# EAGLE board Daughter_Board_V1 (EAGLE 9.6.2)
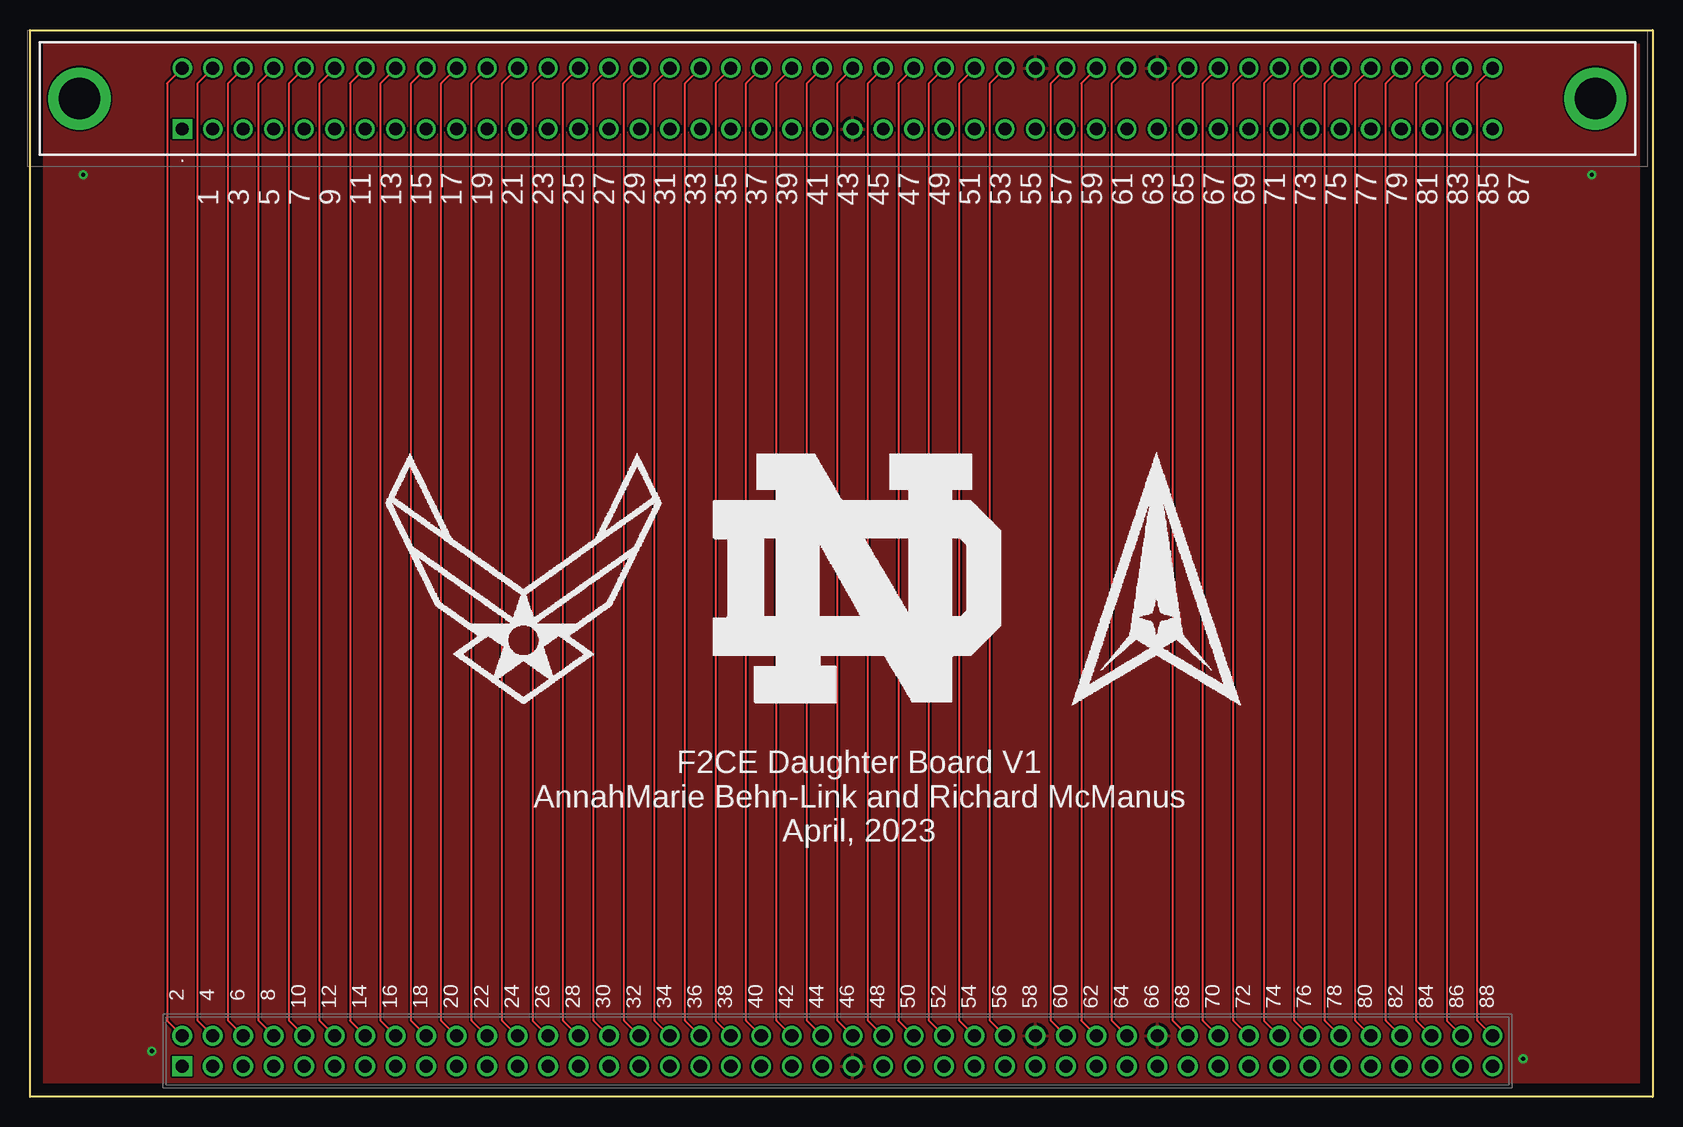
[diagram p0: board, top side]
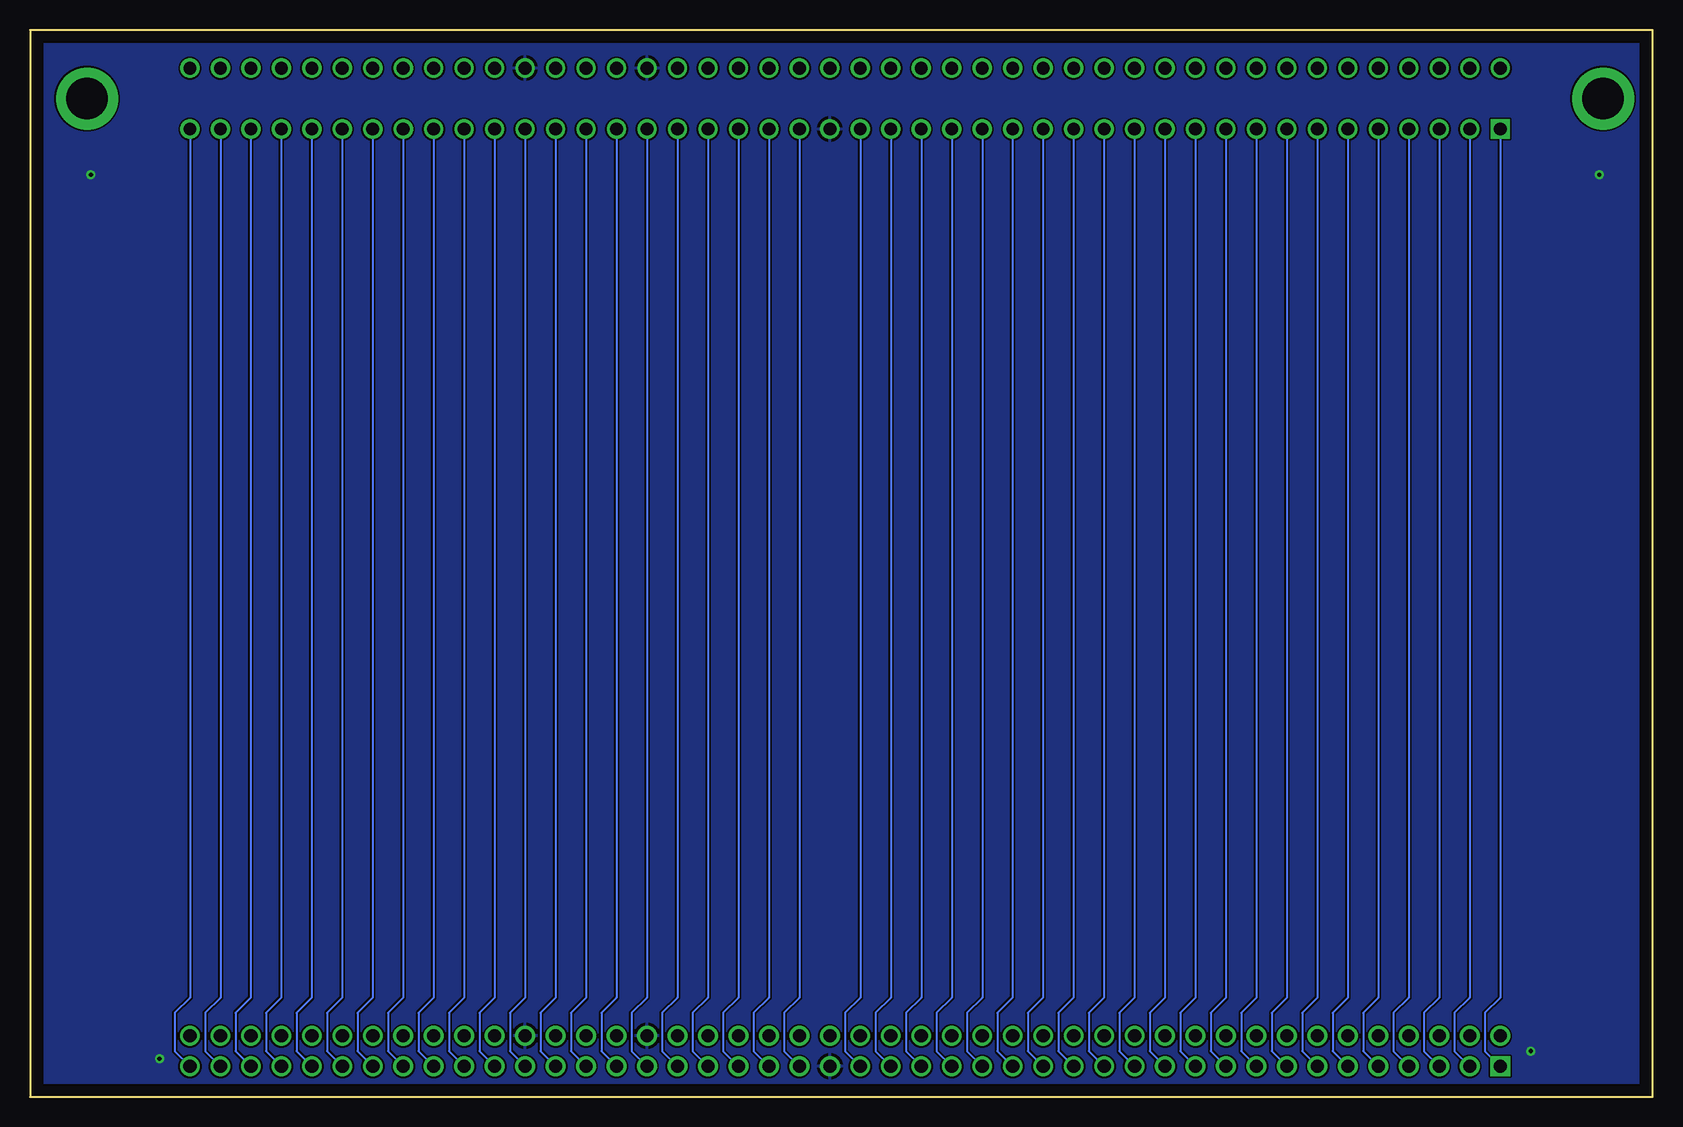
[diagram p1: board, bottom side, seen from below]

Size 135.25 x 88.9 mm. Coordinates in mm from the lower left corner, seen from the top.
Outline: 0,0 0,88.9 135.25,88.9 135.25,0 0,0
Copper layers (1*16): Top 0.035mm / dielectric 1.5mm / Bottom 0.035mm
Design rules "default": minimum track width 6mil, minimum drill 0.35mm, track to track 6mil, track to pad 6mil, pad to pad 6mil, via to via 6mil, smd to smd 6mil, copper to edge 40mil, drill to drill 6mil, minimum pad ring 10mil, minimum via ring 8mil, stop-mask expansion 4mil, vias tented up to drill 0mil, thermal gap 10mil

## Footprints (pad centres in the part's own frame; a part is rotated, then mirrored left to right if it is on the bottom)
88-PIN-HEADER = drill 1.1 pad 1.65 square: 1 0,109.22 | drill 1.1 pad 1.65: 2 2.54,109.22; 3 0,106.68; 4 2.54,106.68; 5 0,104.14; 6 2.54,104.14; 7 0,101.6; 8 2.54,101.6; 9 0,99.06; 10 2.54,99.06; 11 0,96.52; 12 2.54,96.52; 13 0,93.98; 14 2.54,93.98; 15 0,91.44; 16 2.54,91.44; 17 0,88.9; 18 2.54,88.9; 19 0,86.36; 20 2.54,86.36; 21 0,83.82; 22 2.54,83.82; 23 0,81.28; 24 2.54,81.28; 25 0,78.74; 26 2.54,78.74; 27 0,76.2; 28 2.54,76.2; 29 0,73.66; 30 2.54,73.66; 31 0,71.12; 32 2.54,71.12; 33 0,68.58; 34 2.54,68.58; 35 0,66.04; 36 2.54,66.04; 37 0,63.5; 38 2.54,63.5; 39 0,60.96; 40 2.54,60.96; 41 0,58.42; 42 2.54,58.42; 43 0,55.88; 44 2.54,55.88; 45 0,53.34; 46 2.54,53.34; 47 0,50.8; 48 2.54,50.8; 49 0,48.26; 50 2.54,48.26; 51 0,45.72; 52 2.54,45.72; 53 0,43.18; 54 2.54,43.18; 55 0,40.64; 56 2.54,40.64; 57 0,38.1; 58 2.54,38.1; 59 0,35.56; 60 2.54,35.56; 61 0,33.02; 62 2.54,33.02; 63 0,30.48; 64 2.54,30.48; 65 0,27.94; 66 2.54,27.94; 67 0,25.4; 68 2.54,25.4; 69 0,22.86; 70 2.54,22.86; 71 0,20.32; 72 2.54,20.32; 73 0,17.78; 74 2.54,17.78; 75 0,15.24; 76 2.54,15.24; 77 0,12.7; 78 2.54,12.7; 79 0,10.16; 80 2.54,10.16; 81 0,7.62; 82 2.54,7.62; 83 0,5.08; 84 2.54,5.08; 85 0,2.54; 86 2.54,2.54; 87 0,0; 88 2.54,0
395088520202 = drill 1.07 pad 1.605 square: 1 0,0 | drill 1.07 pad 1.605: 2 0,5.08; 3 2.54,0; 4 2.54,5.08; 5 5.08,0; 6 5.08,5.08; 7 7.62,0; 8 7.62,5.08; 9 10.16,0; 10 10.16,5.08; 11 12.7,0; 12 12.7,5.08; 13 15.24,0; 14 15.24,5.08; 15 17.78,0; 16 17.78,5.08; 17 20.32,0; 18 20.32,5.08; 19 22.86,0; 20 22.86,5.08; 21 25.4,0; 22 25.4,5.08; 23 27.94,0; 24 27.94,5.08; 25 30.48,0; 26 30.48,5.08; 27 33.02,0; 28 33.02,5.08; 29 35.56,0; 30 35.56,5.08; 31 38.1,0; 32 38.1,5.08; 33 40.64,0; 34 40.64,5.08; 35 43.18,0; 36 43.18,5.08; 37 45.72,0; 38 45.72,5.08; 39 48.26,0; 40 48.26,5.08; 41 50.8,0; 42 50.8,5.08; 43 53.34,0; 44 53.34,5.08; 45 55.88,0; 46 55.88,5.08; 47 58.42,0; 48 58.42,5.08; 49 60.96,0; 50 60.96,5.08; 51 63.5,0; 52 63.5,5.08; 53 66.04,0; 54 66.04,5.08; 55 68.58,0; 56 68.58,5.08; 57 71.12,0; 58 71.12,5.08; 59 73.66,0; 60 73.66,5.08; 61 76.2,0; 62 76.2,5.08; 63 78.74,0; 64 78.74,5.08; 65 81.28,0; 66 81.28,5.08; 67 83.82,0; 68 83.82,5.08; 69 86.36,0; 70 86.36,5.08; 71 88.9,0; 72 88.9,5.08; 73 91.44,0; 74 91.44,5.08; 75 93.98,0; 76 93.98,5.08; 77 96.52,0; 78 96.52,5.08; 79 99.06,0; 80 99.06,5.08; 81 101.6,0; 82 101.6,5.08; 83 104.14,0; 84 104.14,5.08; 85 106.68,0; 86 106.68,5.08; 87 109.22,0; 88 109.22,5.08 | drill 3.45 pad 5.175: MH1 -8.575,2.54; MH2 117.795,2.54

## Placement (x,y rotation side)
J1  88-PIN-HEADER  [88-PIN-HEADER]  121.92,2.54 90 top
J2  395-088-520-202  [395088520202]  12.7,80.65 0 top

## Library data of the parts
J1 = 88-PIN-HEADER; DESCRIPTION: Headers & Wire Housings CGrid Bkwy Hdr DR Rt DR RtPn 15''SAu 4Ckt; HEIGHT: 8.51mm; MANUFACTURER_NAME: Molex; MANUFACTURER_PART_NUMBER: 70287-1098; MOUSER_PART_NUMBER: 538-70287-1098; MOUSER_PRICE-STOCK: https://www.mouser.co.uk/ProductDetail/Molex/70287-1098?qs=kYQSPAH4sJyJ%2F7vCw3ffjg%3D%3D
J2 = 395-088-520-202; DESCRIPTION: Standard Card Edge Connectors .100" (2.54mm) Pitch Card Edge Connector; HEIGHT: 15.24mm; MANUFACTURER_NAME: EDAC; MANUFACTURER_PART_NUMBER: 395-088-520-202

## Nets
GND: J1.45 J1.58 J1.66 J2.45 J2.58 J2.66
N$1: J1.87 J2.87
N$2: J1.85 J2.85
N$3: J1.83 J2.83
N$4: J1.81 J2.81
N$5: J1.79 J2.79
N$6: J1.77 J2.77
N$7: J1.75 J2.75
N$8: J1.73 J2.73
N$9: J1.71 J2.71
N$10: J1.69 J2.69
N$11: J1.67 J2.67
N$12: J1.65 J2.65
N$13: J1.63 J2.63
N$14: J1.61 J2.61
N$15: J1.59 J2.59
N$16: J1.57 J2.57
N$17: J1.55 J2.55
N$18: J1.53 J2.53
N$19: J1.51 J2.51
N$20: J1.49 J2.49
N$21: J1.47 J2.47
N$23: J1.43 J2.43
N$24: J1.41 J2.41
N$25: J1.39 J2.39
N$26: J1.37 J2.37
N$27: J1.35 J2.35
N$28: J1.33 J2.33
N$29: J1.31 J2.31
N$30: J1.29 J2.29
N$31: J1.27 J2.27
N$32: J1.25 J2.25
N$33: J1.23 J2.23
N$34: J1.21 J2.21
N$35: J1.19 J2.19
N$36: J1.17 J2.17
N$37: J1.15 J2.15
N$38: J1.13 J2.13
N$39: J1.11 J2.11
N$40: J1.9 J2.9
N$41: J1.7 J2.7
N$42: J1.5 J2.5
N$43: J1.3 J2.3
N$44: J1.1 J2.1
N$45: J1.88 J2.88
N$46: J1.86 J2.86
N$47: J1.84 J2.84
N$48: J1.82 J2.82
N$49: J1.80 J2.80
N$50: J1.78 J2.78
N$51: J1.76 J2.76
N$52: J1.72 J2.72
N$53: J1.70 J2.70
N$54: J1.74 J2.74
N$55: J1.68 J2.68
N$57: J1.64 J2.64
N$58: J1.62 J2.62
N$59: J1.60 J2.60
N$61: J1.56 J2.56
N$62: J1.54 J2.54
N$63: J1.52 J2.52
N$64: J1.50 J2.50
N$65: J1.48 J2.48
N$66: J1.46 J2.46
N$67: J1.44 J2.44
N$68: J1.42 J2.42
N$69: J1.40 J2.40
N$70: J1.38 J2.38
N$71: J1.36 J2.36
N$72: J1.34 J2.34
N$73: J1.32 J2.32
N$74: J1.30 J2.30
N$75: J1.28 J2.28
N$76: J1.26 J2.26
N$77: J1.24 J2.24
N$78: J1.22 J2.22
N$79: J1.20 J2.20
N$80: J1.18 J2.18
N$81: J1.16 J2.16
N$82: J1.14 J2.14
N$83: J1.12 J2.12
N$84: J1.10 J2.10
N$85: J1.8 J2.8
N$86: J1.6 J2.6
N$87: J1.4 J2.4
N$88: J1.2 J2.2

## Tracks (layer width: path | path; a pad name or v marks a point on that pad's centre or on a via)
GND  (via drill 0.35)
  other vias: 10.16,3.81 124.46,3.17 130.18,76.84 4.44,76.84
  pour Top: 0,0 0,88.9 135.25,88.9 135.25,0
  pour Bottom: 0,0 0,88.9 135.25,88.9 135.25,0
N$1
  Bottom 0.152: J2.87 121.92,8.26 123.19,6.98 123.19,3.81 J1.87
N$2
  Bottom 0.152: J2.85 119.38,8.26 120.65,6.98 120.65,3.81 J1.85
N$3
  Bottom 0.152: J2.83 116.84,8.26 118.11,6.98 118.11,3.81 J1.83
N$4
  Bottom 0.152: J2.81 114.3,8.26 115.57,6.98 115.57,3.81 J1.81
N$5
  Bottom 0.152: J2.79 111.76,8.26 113.03,6.98 113.03,3.81 J1.79
N$6
  Bottom 0.152: J2.77 109.22,8.26 110.49,6.98 110.49,3.81 J1.77
N$7
  Bottom 0.152: J2.75 106.68,8.26 107.95,6.98 107.95,3.81 J1.75
N$8
  Bottom 0.152: J2.73 104.14,8.26 105.41,6.98 105.41,3.81 J1.73
N$9
  Bottom 0.152: J2.71 101.6,8.26 102.87,6.98 102.87,3.81 J1.71
N$10
  Bottom 0.152: J2.69 99.06,8.26 100.33,6.98 100.33,3.81 J1.69
N$11
  Bottom 0.152: J2.67 96.52,8.26 97.79,6.98 97.79,3.81 J1.67
N$12
  Bottom 0.152: J2.65 93.98,8.26 95.25,6.98 95.25,3.81 J1.65
N$13
  Bottom 0.152: J2.63 91.44,8.26 92.71,6.98 92.71,3.81 J1.63
N$14
  Bottom 0.152: J2.61 88.9,8.26 90.17,6.98 90.17,3.81 J1.61
N$15
  Bottom 0.152: J2.59 86.36,8.26 87.63,6.98 87.63,3.81 J1.59
N$16
  Bottom 0.152: J2.57 83.82,8.26 85.09,6.98 85.09,3.81 J1.57
N$17
  Bottom 0.152: J2.55 81.28,8.26 82.55,6.98 82.55,3.81 J1.55
N$18
  Bottom 0.152: J2.53 78.74,8.26 80.01,6.98 80.01,3.81 J1.53
N$19
  Bottom 0.152: J2.51 76.2,8.26 77.47,6.98 77.47,3.81 J1.51
N$20
  Bottom 0.152: J2.49 73.66,8.26 74.93,6.98 74.93,3.81 J1.49
N$21
  Bottom 0.152: J2.47 71.12,8.26 72.39,6.98 72.39,3.81 J1.47
N$23
  Bottom 0.152: J2.43 66.04,8.26 67.31,6.98 67.31,3.81 J1.43
N$24
  Bottom 0.152: J2.41 63.5,8.26 64.77,6.98 64.77,3.81 J1.41
N$25
  Bottom 0.152: J2.39 60.96,8.26 62.23,6.98 62.23,3.81 J1.39
N$26
  Bottom 0.152: J2.37 58.42,8.26 59.69,6.98 59.69,3.81 J1.37
N$27
  Bottom 0.152: J2.35 55.88,8.26 57.15,6.98 57.15,3.81 J1.35
N$28
  Bottom 0.152: J2.33 53.34,8.26 54.61,6.98 54.61,3.81 J1.33
N$29
  Bottom 0.152: J2.31 50.8,8.26 52.07,6.98 52.07,3.81 J1.31
N$30
  Bottom 0.152: J2.29 48.26,8.26 49.53,6.98 49.53,3.81 J1.29
N$31
  Bottom 0.152: J2.27 45.72,8.26 46.99,6.98 46.99,3.81 J1.27
N$32
  Bottom 0.152: J2.25 43.18,8.26 44.45,6.98 44.45,3.81 J1.25
N$33
  Bottom 0.152: J2.23 40.64,8.26 41.91,6.98 41.91,3.81 J1.23
N$34
  Bottom 0.152: J2.21 38.1,8.26 39.37,6.98 39.37,3.81 J1.21
N$35
  Bottom 0.152: J2.19 35.56,8.26 36.83,6.98 36.83,3.81 J1.19
N$36
  Bottom 0.152: J2.17 33.02,8.26 34.29,6.98 34.29,3.81 J1.17
N$37
  Bottom 0.152: J2.15 30.48,8.26 31.75,6.98 31.75,3.81 J1.15
N$38
  Bottom 0.152: J2.13 27.94,8.26 29.21,6.98 29.21,3.81 J1.13
N$39
  Bottom 0.152: J2.11 25.4,8.26 26.67,6.98 26.67,3.81 J1.11
N$40
  Bottom 0.152: J2.9 22.86,8.26 24.13,6.98 24.13,3.81 J1.9
N$41
  Bottom 0.152: J2.7 20.32,8.26 21.59,6.98 21.59,3.81 J1.7
N$42
  Bottom 0.152: J2.5 17.78,8.26 19.05,6.98 19.05,3.81 J1.5
N$43
  Bottom 0.152: J2.3 15.24,8.26 16.51,6.98 16.51,3.81 J1.3
N$44
  Bottom 0.152: J2.1 12.7,8.26 13.97,6.98 13.97,3.81 J1.1
N$45
  Top 0.152: J1.88 120.65,6.35 120.65,84.45 J2.88
N$46
  Top 0.152: J2.86 118.11,84.45 118.11,6.35 J1.86
N$47
  Top 0.152: J1.84 115.57,6.35 115.57,84.45 J2.84
N$48
  Top 0.152: J1.82 113.03,6.35 113.03,84.45 J2.82
N$49
  Top 0.152: J1.80 110.49,6.35 110.49,84.45 J2.80
N$50
  Top 0.152: J1.78 107.95,6.35 107.95,84.45 J2.78
N$51
  Top 0.152: J1.76 105.41,6.35 105.41,84.45 J2.76
N$52
  Top 0.152: J1.72 100.33,6.35 100.33,84.45 J2.72
N$53
  Top 0.152: J1.70 97.79,6.35 97.79,84.45 J2.70
N$54
  Top 0.152: J2.74 102.87,84.45 102.87,6.35 J1.74
N$55
  Top 0.152: J1.68 95.25,6.35 95.25,84.45 J2.68
N$57
  Top 0.152: J1.64 90.17,6.35 90.17,84.45 J2.64
N$58
  Top 0.152: J2.62 87.63,84.45 87.63,6.35 J1.62
N$59
  Top 0.152: J1.60 85.09,6.35 85.09,84.45 J2.60
N$61
  Top 0.152: J1.56 80.01,6.35 80.01,84.45 J2.56
N$62
  Top 0.152: J1.54 77.47,6.35 77.47,84.45 J2.54
N$63
  Top 0.152: J1.52 74.93,6.35 74.93,84.45 J2.52
N$64
  Top 0.152: J2.50 72.39,84.45 72.39,6.35 J1.50
N$65
  Top 0.152: J1.48 69.85,6.35 69.85,84.45 J2.48
N$66
  Top 0.152: J1.46 67.31,6.35 67.31,84.45 J2.46
N$67
  Top 0.152: J1.44 64.77,6.35 64.77,84.45 J2.44
N$68
  Top 0.152: J1.42 62.23,6.35 62.23,84.45 J2.42
N$69
  Top 0.152: J1.40 59.69,6.35 59.69,84.45 J2.40
N$70
  Top 0.152: J2.38 57.15,84.45 57.15,6.35 J1.38
N$71
  Top 0.152: J1.36 54.61,6.35 54.61,84.45 J2.36
N$72
  Top 0.152: J1.34 52.07,6.35 52.07,84.45 J2.34
N$73
  Top 0.152: J1.32 49.53,6.35 49.53,84.45 J2.32
N$74
  Top 0.152: J1.30 46.99,6.35 46.99,84.45 J2.30
N$75
  Top 0.152: J1.28 44.45,6.35 44.45,84.45 J2.28
N$76
  Top 0.152: J2.26 41.91,84.45 41.91,6.35 J1.26
N$77
  Top 0.152: J1.24 39.37,6.35 39.37,84.45 J2.24
N$78
  Top 0.152: J1.22 36.83,6.35 36.83,84.45 J2.22
N$79
  Top 0.152: J1.20 34.29,6.35 34.29,84.45 J2.20
N$80
  Top 0.152: J1.18 31.75,6.35 31.75,84.45 J2.18
N$81
  Top 0.152: J1.16 29.21,6.35 29.21,84.45 J2.16
N$82
  Top 0.152: J2.14 26.67,84.45 26.67,6.35 J1.14
N$83
  Top 0.152: J1.12 24.13,6.35 24.13,84.45 J2.12
N$84
  Top 0.152: J1.10 21.59,6.35 21.59,84.45 J2.10
N$85
  Top 0.152: J1.8 19.05,6.35 19.05,84.45 J2.8
N$86
  Top 0.152: J1.6 16.51,6.35 16.51,84.45 J2.6
N$87
  Top 0.152: J1.4 13.97,6.35 13.97,84.45 J2.4
N$88
  Top 0.152: J2.2 11.43,84.45 11.43,6.35 J1.2

## Text on the board
tPlace: 2 | 4 | 6 | 8 | 10 | 12 | 14 | 16 | 18 | 20 | 22 | 24 | 26 | 28 | 30 | 32 | 34 | 36 | 38 | 40 | 42 | 44 | 46 | 48 | 50 | 52 | 54 | 56 | 58 | 60 | 62 | 64 | 66 | 68 | 70 | 72 | 74 | 76 | 78 | 80 | 82 | 84 | 86 | 88
tNames: F2CE Daughter Board V1 / AnnahMarie Behn-Link and Richard McManus / April, 2023